# Altium PCB PCB.PcbDoc
Units mil, origin at the board's own origin, x right, y up, seen from the top; angles counter-clockwise.
Board outline 2155 x 1695 mil, 2 copper layers (Top Layer, Bottom Layer); 28 components, 24 nets, 148 pads, 0 vias.
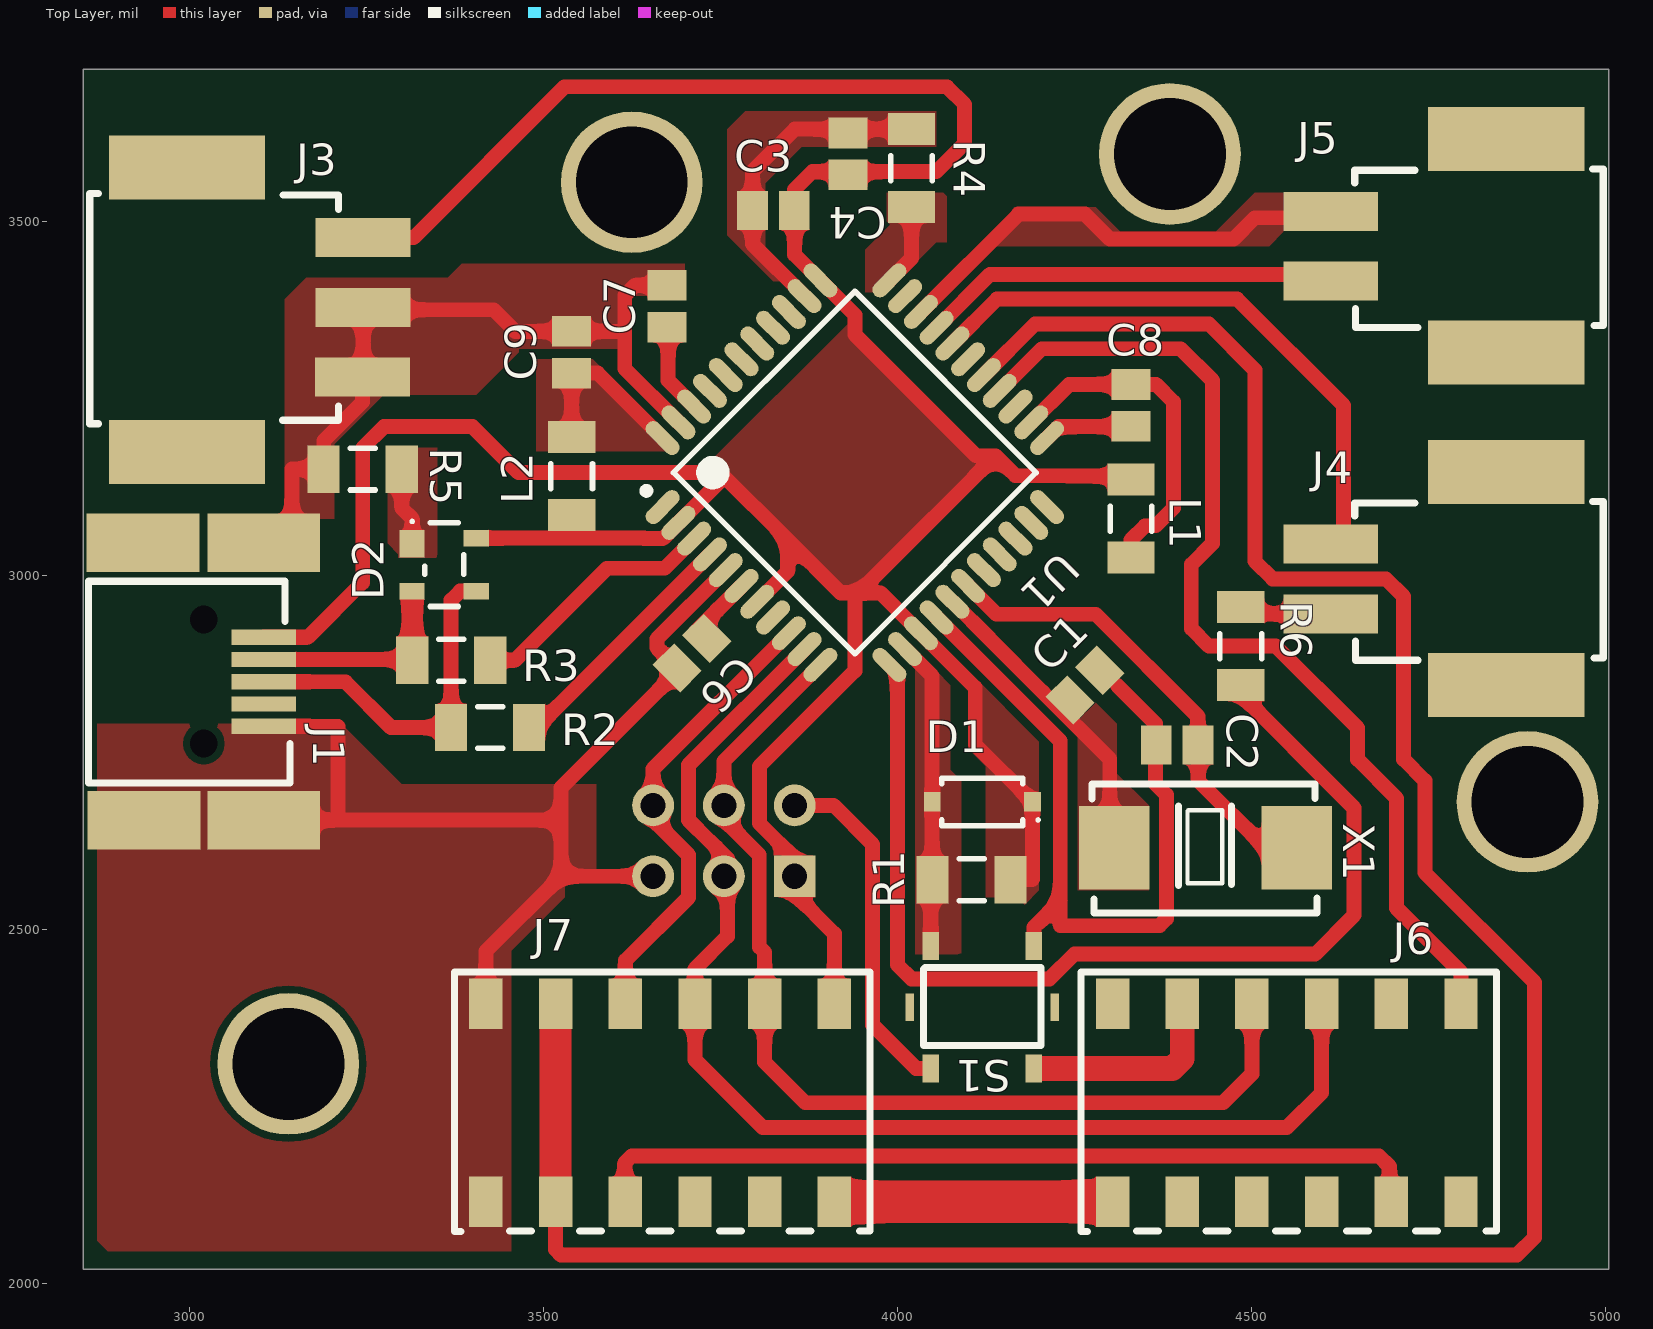
[diagram p0: Top Layer view]
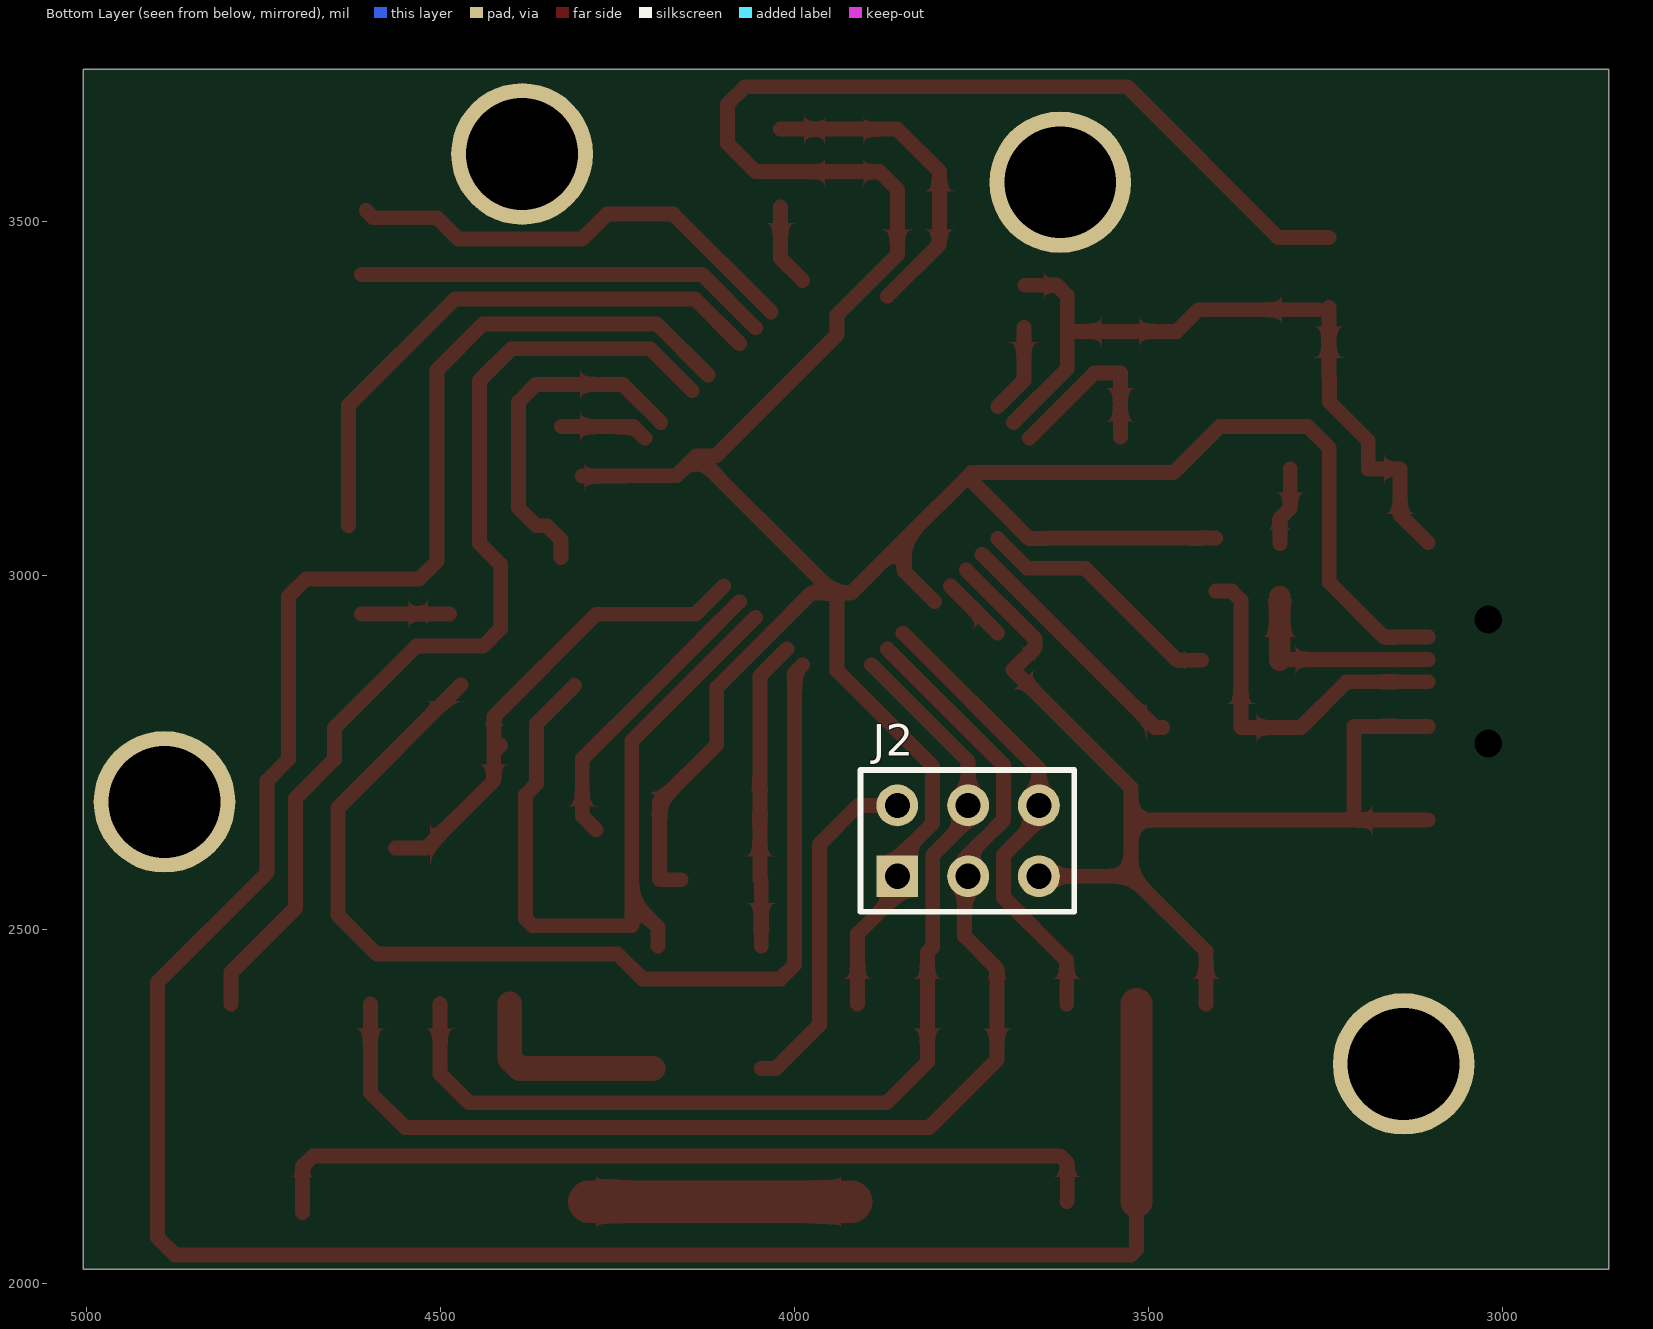
[diagram p1: Bottom Layer view, seen from below]
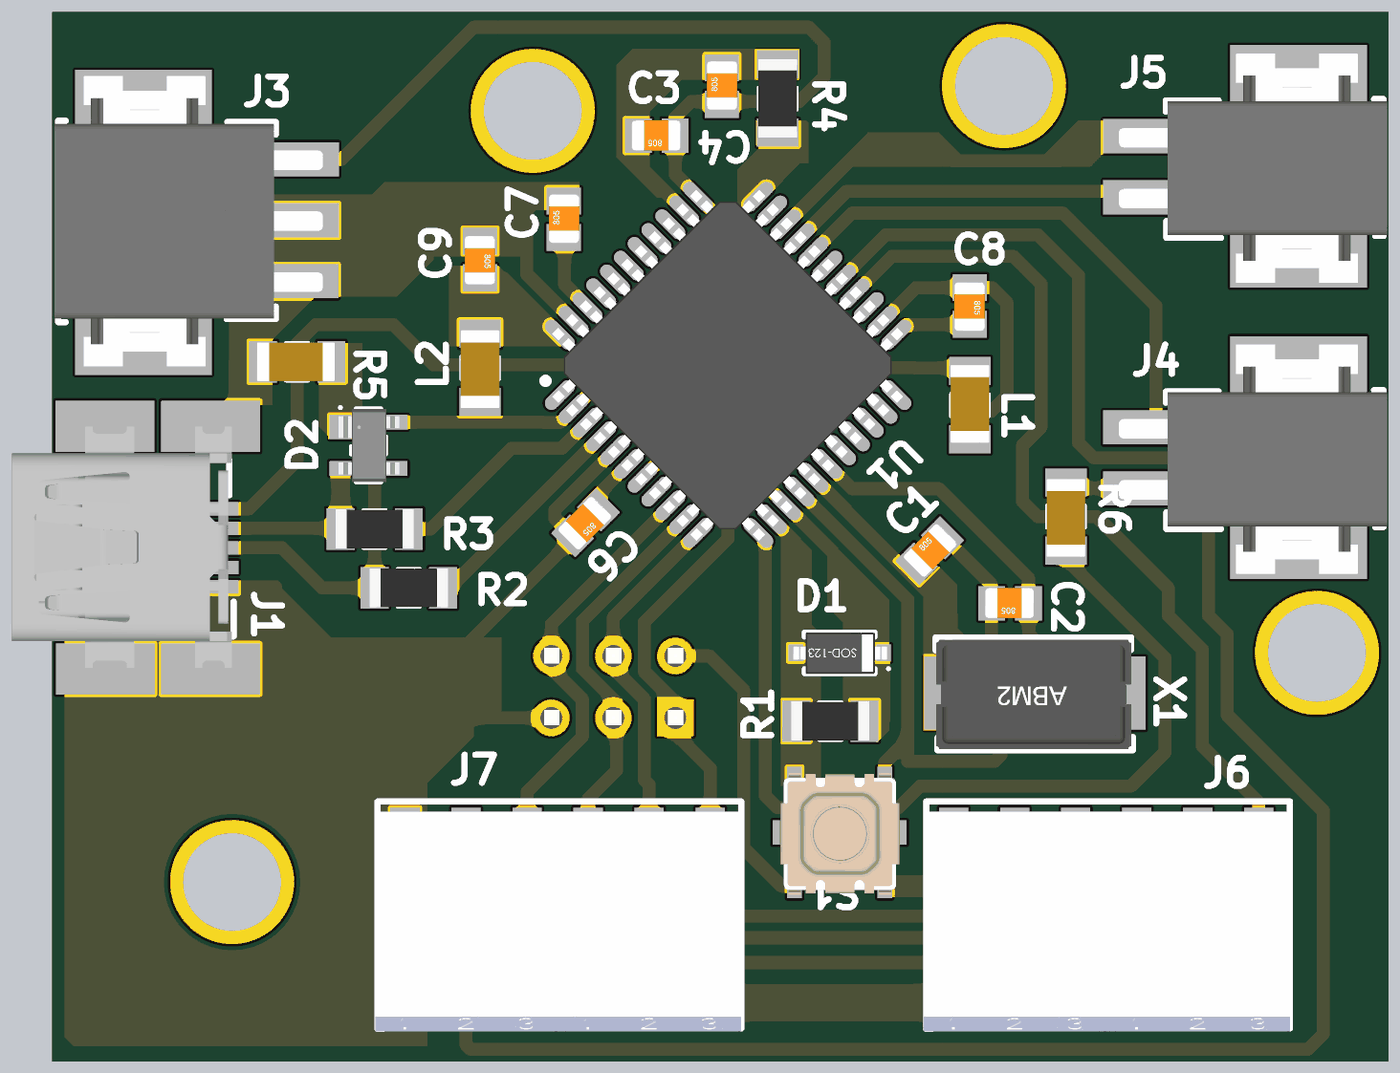
[diagram p2: 3D render of the assembled board from above, using the file's embedded part models]

## Layer stack, top to bottom
Top Solder: solder mask 0.4, Solder Resist, Dk 3.5
Top Layer: signal copper 1.4
Dielectric 1: dielectric 12.6, FR-4, Dk 4.8
Bottom Layer: signal copper 1.4
Bottom Solder: solder mask 0.4, Solder Resist, Dk 3.5

## Board outline
2850,2020 5005,2020 5005,3715 2850,3715

## Design rules (kind name [scope] priority, off if disabled: settings)
Clearance [All] p1: gap=9.8
PolygonConnect [All] p1: connectstyle=Direct reliefconductorwidth=10 reliefentries=4 polygonreliefangle="90 Angle" airgapwidth=10
RoomDefinition SCH [InComponentClass('SCH')] p1: confinementstyle=ConfineOut formatcopy=TRUE lockcomponents=FALSE outline 4675,3755 4985,3755 4985,3950 4675,3950
RoutingVias [All] p1: holewidth=28 width=50 viastyle="Through Hole" minholewidth=28 minwidth=50 maxholewidth=28 maxwidth=50
SolderMaskExpansion [All] p1: expansion=4
Width [All] p1: maxlimit=80 minlimit=10 preferedwidth=30 minimp=50.000000 maximp=50.000000 favimp=50.000000
30 further rules are at their usual default settings.

## Components (designator, comment, footprint, x,y, rotation, side; value= is the part's Value field where it differs from the comment)
C1 "18pF" C0805 4265,2845 r225 top
C2 "18pF" C0805 4395,2760 r0 top
C3 "100nF" C0805 3825,3515 r0 top
C4 "1uF" C0805 3930,3595 r270 top
C6 "100nF" C0805 3710,2890 r45 top
C7 "100nF" C0805 3675,3380 r270 top
C8 "100nF" C0805 4330,3240 r90 top
C9 "100nF" C0805 3540,3315 r90 top
D1 "1N4148" SOD-123 4120,2680 r180 top
D2 "PRTR5V0U2X" SOT143B 3360,3015 r0 top
J1 "USB" "USB Mini-B SMD" 3020,2850 r0 top
J2 "ISP" Header-3x2 3755,2625 r90 bottom
J3 "VCC" TB_SMD_3v 3121.27,3375 r180 top
J4 "M1" TB_SMD_2V 4855,3005 r0 top
J5 "M2" TB_SMD_2V 4855,3475 r0 top
J6 "Encoder-2" "Poke Home H6" 4550,2255 r0 top locked
J7 "Encoder-1" "Poke Home H6" 3665,2255 r0 top locked
L1 "600 Ohm 1.5A" CC_1206 4330,3080 r270 top
L2 "600 Ohm 1.5A" CC_1206 3540,3140 r90 top
R1 "10k" RES_1206 4105,2570 r180 top
R2 "22" RES_1206 3425,2785 r0 top
R3 "22" RES_1206 3370,2880 r0 top
R4 "1k" RES_1206 4020,3575 r90 top
R5 "0" 1206-0Ohm 3245,3150 r0 top
R6 "0" 1206-0Ohm 4485,2900 r90 top
S1 "Boot" EVQPL 4120,2390 r0 top
U1 "ATMEGA32U4" TQFP44 3940,3145 r45 top locked
X1 "16MHz" "ABM2 - XTAL" 4435,2615 r180 top

## Footprints (in the part's own frame and the unit in brackets; to place one, negate y for a bottom-side part, rotate by r counter-clockwise, add the part's x,y. Pads: shape width x height; smd on the part's side, far side on the other; paste and mask are expansions set on the pad)
1206-0Ohm [mm] "Puente 1206"
  rect 1.15x1.7 smd: 1(-1.4,0) 2(1.4,0)
  silkscreen extent -0.45,-0.75 0.45,0.75, body extent -1.65,-0.8 1.55,0.8, height 1
"ABM2 - XTAL" [mm] "Surface Mount 2-SMD, No Lead"
  rect 2.524x3 smd: 1(-3.274,0) 2(3.274,0)
  silkscreen extent -4.01,-2.29 4.07,2.34, body extent -3.95,-2.2 4.05,2.3, height 1.4
C0805 [mm] "Chip Capacitor, Body 2.0x1.3mm, IPC High Density"
  rect 1.1x1.4 smd: 1(-0.75,0) 2(0.75,0)
  body extent -1.03,-0.61 0.97,0.64, height 0.78
CC_1206 [mm] "Capacitor ceramico SMD Y5V 50V"
  rect 1.15x1.7 smd: 1(-1.4,0) 2(1.4,0)
  silkscreen extent -0.45,-0.75 0.45,0.75, body extent -1.65,-0.8 1.55,0.8, height 1
EVQPL [mm] "Panasonic EVQPL Tactile Switch"
  rect 0.3x1 smd: 0(-2.6,0) 0(2.6,0)
  rect 0.6x1 smd: 1(-1.85,-2.2) 1(-1.85,2.2) 2(1.85,-2.2) 2(1.85,2.2)
  silkscreen extent -2.11,-1.37 2.11,1.42, body extent -2.44,-2.55 2.46,2.45, height 1.5
Header-3x2 [mm] "HEADER, 2X3, 2.54MM X 2.54MM PITCH, VERT, TH"
  rect 1.5x1.5 hole 0.9: 1(-1.27,2.54)
  round 1.5 hole 0.9: 2(1.27,2.54) 3(-1.27,0) 4(1.27,0) 5(-1.27,-2.54) 6(1.27,-2.54)
  silkscreen extent -2.54,-3.81 2.54,3.86, body extent -2.54,-3.81 2.54,3.81, height 8.38
"Poke Home H6" [mm] "AVX Poke-Home: Horizontal 18-26 AWG: WTB - 6 ways"
  rect 1.2x1.8 smd: 1(-6.25,-3.55) 1(-6.25,3.55) 2(-3.75,-3.55) 2(-3.75,3.55) 3(-1.25,-3.55) 3(-1.25,3.55) 4(1.25,-3.55) 4(1.25,3.55) 5(3.75,-3.55) 5(3.75,3.55) 6(6.25,-3.55) 6(6.25,3.55)
  silkscreen extent -7.38,-4.62 7.53,4.7, body extent -7.47,-4.72 7.53,4.28, height 5.1
RES_1206 [mm] "Chip Resistor, 2-Leads, Body 3,10x1,55mm, IPC Medium Density"
  rect 1.15x1.7 smd: 1(-1.4,0) 2(1.4,0)
  silkscreen extent -0.45,-0.75 0.45,0.75, body extent -1.6,-0.8 1.6,0.8, height 0.55
SOD-123 [mm] "SODFL, 2-Leads, Body 1.55x3.65mm, IPC Medium Density"
  rect 0.6x0.7 smd: 1(-1.8,0) 2(1.8,0)
  silkscreen extent -2.05,-0.85 1.45,0.85, body extent -1.95,-0.84 1.9,0.86, height 1.43
SOT143B [mm] "SOT143, 4-Leads, Body 2.92x2.30mm, Pitch 1.90mm, IPC Medium Density"
  rect 0.9x1 smd: 1(-1.15,0.75)
  rect 0.9x0.6 smd: 2(-1.15,-0.95) 3(1.15,-0.95) 4(1.15,0.95)
  silkscreen extent -1.2,-1.5 0.7,1.6, body extent -1.22,-1.5 1.27,1.5, height 1.09
TB_SMD_2V [mm] "PC terminal block, 6 A, 160 V, Pitch: 2.5  mm, Spring-cage conn.,  SMD"
  rect 5.6x2.3 smd: 0(0.127,-4.068) 0(0.127,3.581)
  rect 3.4x1.4 smd: 1(-6.172,0.991) 2(-6.172,-1.509)
  silkscreen extent -5.31,-3.17 3.61,2.51, body extent -7.23,-5.02 3.77,4.38, height 5
TB_SMD_3v [mm] "PC terminal block, 6 A, 32 V, Pitch: 2.5  mm, Spring-cage conn.,  SMD"
  rect 5.6x2.3 smd: 0(3.155,5.1) 0(3.155,-5.1)
  rect 3.4x1.4 smd: 1(-3.13,2.413) 2(-3.155,-0.087) 3(-3.155,-2.587)
  silkscreen extent -2.27,-4.17 6.65,4.09, body extent -4.2,-6 6.8,5.9, height 5
TQFP44 [mm] "TQFP, 44-Leads, Body 10.00x10.00mm, Pitch 0.80mm, IPC Medium Density"
  oval 1.5x0.55 smd: 1(-5.75,4) 2(-5.75,3.2) 3(-5.75,2.4) 4(-5.75,1.6) 5(-5.75,0.8) 6(-5.75,0) 7(-5.75,-0.8) 8(-5.75,-1.6) 9(-5.75,-2.4) 10(-5.75,-3.2) 11(-5.75,-4) 23(5.75,-4) 24(5.75,-3.2) 25(5.75,-2.4) 26(5.75,-1.6) 27(5.75,-0.8) 28(5.75,0) 29(5.75,0.8) 30(5.75,1.6) 31(5.75,2.4) 32(5.75,3.2) 33(5.75,4)
  oval 0.55x1.5 smd: 12(-4,-5.75) 13(-3.2,-5.75) 14(-2.4,-5.75) 15(-1.6,-5.75) 16(-0.8,-5.75) 17(0,-5.75) 18(0.8,-5.75) 19(1.6,-5.75) 20(2.4,-5.75) 21(3.2,-5.75) 22(4,-5.75) 34(4,5.75) 35(3.2,5.75) 36(2.4,5.75) 37(1.6,5.75) 38(0.8,5.75) 39(0,5.75) 40(-0.8,5.75) 41(-1.6,5.75) 42(-2.4,5.75) 43(-3.2,5.75) 44(-4,5.75)
  silkscreen extent -5.87,-4.6 4.6,4.95, body extent -6.03,-6.01 5.97,5.99, height 1.1
"USB Mini-B SMD" [mm] "USB Series Mini-B Receptacle"
  round 0.95 hole 1: 0(0.013,-2.225) 0(0.013,2.225)
  rect 2.3x0.55 smd: 1(2.163,1.59) 2(2.163,0.79) 3(2.163,-0.01) 4(2.163,-0.81) 5(2.163,-1.61)
  rect 4.05x2.1 smd: MH(-2.163,4.975) MH(-2.137,-4.975) MH(2.163,-4.975) MH(2.163,4.975)
  silkscreen extent -4.13,-3.64 3.11,3.6, body extent -5.96,-4.93 3.04,4.97, height 3.9

## Part data
C1 C2 C3 C4 C6 C7 C8 C9: library part CAP_CERAMICO, "Ceramic/Tantalum Capacitor"
D1: library part Diodo, "Diodo"
D2: library part ESD-USB, "TVS DIODE 5.5VWM SOT143B"
J1: library part "USB Mini-B", "USB On-The-Go (OTG) Mini-B Receptacle, Right Angle, Thru-Hole, 0.80mm (.031\") Pitch, Solder Tails & Shell Tabs with Dimples"
J2: library part Header_6, "6-pin male header"
J3: library part TB_3, "3-ways Terminal Block"
J4 J5: library part TB_2, "Terminal Block 2 ways"
J6 J7: library part TB_6, "6-ways Terminal Block"
L1 L2: library part Inductor, "Inductor"
R1 R2 R3 R4 R5 R6: library part Resistor, "Resistor"
S1: library part BUTTON, "Switch Button"
U1: "AVR ATmega Microcontroller IC 8-Bit 16MHz 32KB (16K x 16) FLASH"
X1: library part Oscillator, "Crystal Oscillator"

## Free pads (board coordinates)
  round 200 hole 158: 0(3140,2310) 0(3625,3555) 0(4385,3595) 0(4890,2680)

## Nets (pads, with @x,y where several pads share a name; then routed paths per layer and width w, separated by ;. In a path a pad name is that pad's centre, name@x,y a point inside that pad or via, vN(x,y) a via of type N, cw(c..) or ccw(c..) an arc to the next point about the centre after c; other vN are vias at no path point)
+5: C3.2 C4.2 D1.1 D2.4 J1.1 J2.1 J3.3 J6.1 J7.6 L1.1 L2.1 R1.1 U1.2 U1.7 U1.14 U1.34 | length 5494.6
  Top Layer w21: J1.1 3167.59,2912.59 3245,2990 3245,3180 3275,3210 3400,3210 3465,3145 3750,3145 3845,3050 ; J3.3 3316.83,3476.83 3530,3690 4070,3690 4095,3665 4095,3610 4055,3570 3880,3570 3854.53,3544.53 C3.2 ; D2.4 3641.98,3052.4 3642.45,3051.93 3668.24,3051.93 3668.71,3052.4 3669.76,3052.4 3690.32,3072.97 3690.32,3074.01 U1.2 3750,3133.17 ; U1.7 3845,3005.46 3845,3050 ; C3.2@3855,3510.47 3855,3452.71 U1.34 3940,3367.71 3940,3340 4111.14,3168.86 4138.86,3168.86 ; J7.6@3911.06,2394.76 3911.06,2493.94 3855,2550 3855,2595 3859.94,2595 3805.17,2649.77 3805.17,2730.17 3940,2865 3940,2970 3966.37,2996.37 4138.86,3168.86 ; R1.1 4190,2570 4190.87,2570.87 D1.1 4110,2760.87 4110,2841.37 U1.14 3976.37,2975 3920,2975 3845,3050 ; L1.1@4300,3140 4240,3140 4240.63,3140.63 4167.08,3140.63 4138.86,3168.86
  Top Layer w60: J7.6@3920,2115.24 J6.1@4290,2115.24
AREF: C7.2 U1.42 | length 127
  Top Layer w21: C7.2@3676.37,3350 3676.37,3275 U1.42
AVCC1: C8.2 L1.2 U1.24 | length 486.8
  Top Layer w21: U1.24 4242.7,3269.53 C8.2 4365.47,3269.53 4389.88,3245.12 4389.88,3094.88 4365,3070 4350,3070 4330,3050 L1.2
AVCC2: C9.1 L2.2 U1.44 | length 256.9
  Top Layer w21: L2.2 C9.1 3576.82,3285.47 U1.44
CS1: J7.2 U1.27 | length 3665.1
  Top Layer w21: J7.2@3517.36,2115.24 3517.36,2047.64 3525,2040 4875,2040 4900,2065 4900,2425 4745,2580 4745,2710 4715,2740 4715,2970 4690,2995 4530,2995 4505,3020 4505,3290 4440,3355 4194.54,3355 U1.27
  Top Layer w45: J7.2@3517.36,2115.24 J7.2@3517.36,2394.76
CS2: J6.6 U1.26 | length 1449.4
  Top Layer w21: U1.26 4204.08,3320 4400,3320 4445,3275 4445,3045 4415,3015 4415,2925 4440,2900 4534.38,2900 4650,2784.38 4650,2740 4705,2685 4705,2530 4796.06,2438.94 J6.6@4796.06,2394.76
GND: C1.1 C2.1 C3.1 C4.1 C6.1 C7.1 C8.1 C9.2 D2.1 J1.5 J1.MH J2.5 J3.1 J3.2 J6.2 J7.1 R4.2 R5.1 R5.2 S1.2 U1.5 U1.15 U1.23 U1.35 U1.43 | length 4699
  Top Layer w21: J1.MH@3105.15,2654.13 3525,2654.13 ; J1.5 3210,2786.61 3210,2655 3209.13,2654.13 ; J1.MH@3105.15,3045.87 3145,3085.72 3145,3150 R5.1 3189.88,3189.88 3244.5,3244.5 J3.1 ; J3.1@3245.5,3280.98 J3.2 ; J3.2@3260,3375 3430,3375 3460.47,3344.53 C9.2 3614.53,3344.53 ; R5.2 3300.12,3094.88 3314.72,3080.28 D2.1 ; J7.1@3418.94,2394.76 3418.94,2468.94 3525,2575 ; 3615,3291.83 U1.43 ; 3615,3294.35 3615,3395 3629.53,3409.53 C7.1 ; J2.5 3525,2575 ; U1.5 3660.46,2910 3660.46,2897.78 3691.62,2866.62 3525,2700 3525,2575 ; U1.35 3795.47,3467.7 C3.1 3795.47,3570.47 3855.12,3630.12 R4.2 ; U1.15 4230,2765.92 4230,2505 4370,2505 4380,2515 4380,2690 4364.53,2705.47 4364.53,2790.47 4310.88,2844.12 ; S1.2@4192.83,2476.61 4192.83,2502.83 4230,2540 ; U1.23 4227.71,3210 C8.1@4329.53,3210
  Top Layer w35: S1.2@4200,2303.39 4388.39,2303.39 4402.36,2317.36 J6.2@4402.36,2394.76
IN1: J5.1 U1.31 | length 660.3
  Top Layer w21: U1.31 4171.37,3510 4265,3510 4300.3,3474.7 4474.7,3474.7 4505,3505 4595,3505 J5.1@4605,3515
IN2: J5.2 U1.30 | length 587.7
  Top Layer w21: U1.30 4130.92,3425 J5.2@4612,3425
IN3: R6.1 U1.12 | length 1515.7
  Top Layer w21: U1.12 4000,2862.29 4000,2450 4020,2430 4215,2430 4250,2465 4590,2465 4645,2520 4645,2671.35 R6.1@4471.35,2845
IN4: J4.1 U1.29 | length 810.3
  Top Layer w21: U1.29 4140.46,3390 4480,3390 4630,3240 J4.1@4630,3070
MISO: J2.4 J6.3 J7.5 U1.11 | length 1469.3
  Top Layer w21: U1.11 3755,2737.29 3755,2655 3805,2605 3805,2475.28 3812.64,2467.64 3812.64,2394.76 3812.64,2312.36 3870,2255 4460,2255 4500.79,2295.79 J6.3@4500.79,2394.76
MOSI: J2.3 J6.4 J7.4 U1.10 | length 1760.5
  Top Layer w21: U1.10 3705.17,2732 3705.17,2654.36 3734.36,2625.17 3734.83,2625.17 3760,2600 3760,2490 3714.21,2444.21 3714.21,2394.76 3714.21,2315.79 3810,2220 4550,2220 4599.21,2269.21 J6.4@4599.21,2394.76
NetD2_2: D2.2 J1.2 R3.1 | length 298.6
  Top Layer w21: J1.2 R3.1@3313.79,2881.09
  Top Layer w30: R3.1 D2.2@3315,2970
NetD2_3: D2.3 J1.3 R2.1 | length 512
  Top Layer w21: J1.3 3220.4,2849.6 3285,2785 R2.1 3369.88,2964.88 3382.6,2977.6 D2.3
NetJ4_2: J4.2 R6.2 | length 124.6
  Top Layer w21: R6.2@4487.37,2945.57 J4.2
NetR2_2: R2.2 U1.4 | length 356.5
  Top Layer w21: R2.2 3490.92,2785 U1.4
NetR3_2: R3.2 U1.3 | length 359.1
  Top Layer w21: R3.2 3460,2880 3529.31,2949.31 3590,3010 3671.37,3010 U1.3
PROG: R4.1 U1.33 | length 116.4
  Top Layer w21: U1.33 4020,3447.71 R4.1
RESET: D1.2 J2.2 R1.2 S1.1 U1.13 | length 928.5
  Top Layer w21: J2.2 3910,2675 3965,2620 3965,2365 4026.61,2303.39 S1.1@4047.17,2303.39 ; U1.13 4049.13,2857.7 D1.2 R1.2@4049.13,2570.75 ; S1.1@4047.17,2476.61 R1.2@4047.17,2568.78
SCK: J2.6 J6.5 J7.3 U1.9 | length 1879.2
  Top Layer w21: J7.3@3615.79,2115.24 3615,2116.02 3615,2170 3625,2180 4680,2180 4695,2165 J6.5@4695,2100 ; J7.3@3615.79,2394.76 3615.79,2455.79 3705,2545 3705,2605 3645,2665 J2.6 3655,2726.37 U1.9
UCAP: C6.2 U1.6 | length 94.1
  Top Layer w21: C6.2@3713.38,2918.38 U1.6
XTAL1: C2.2 U1.17 X1.1 | length 678.7
  Top Layer w21: U1.17 4140,2945 4280,2945 4424.53,2800.47 C2.2@4424.53,2755 ; C2.2@4415,2760 4425,2750 4425,2710 4520,2615 X1.1
XTAL2: C1.2 U1.16 X1.2 | length 423.2
  Top Layer w21: U1.16 4078.32,2962.66 4130.98,2910 4130.47,2910 4205.47,2835 4300,2740.47 4300,2660.16 X1.2@4280.47,2640.63
pads on no net: J1.0 J1.4 J3.0 J4.0 J5.0 S1.0 U1.1 U1.8 U1.18 U1.19 U1.20 U1.21 U1.22 U1.25 U1.28 U1.32 U1.36 U1.37 U1.38 U1.39 U1.40 U1.41

## Polygon pours and split planes (outlines as drawn)
GND on Top Layer "Top Layer-No Net" (solid, pour order 10): 3280,3180 3350,3180 3350,3030 3355,3025 3295,3025 3295,3030 3280,3045
GND on Top Layer "Top Layer-No Net" (solid, pour order 8): 3614.53,3344.53 3625,3355 3625,3395 3700,3395 3700,3440 3385,3440 3370,3425 3365,3420 3305,3420 3165,3420 3145,3400 3135,3390 3135,3140 3135,3096.06 3132.35,3093.41 3145.75,3080 3205,3080 3205,3185 3250,3230 3275,3255 3330,3255 3405,3255 3410,3260 3465,3315 3465,3320 3615,3320 3620,3325
AVCC2 on Top Layer "Top Layer-No Net" (solid, pour order 6): 3684.68,3175 3560,3175 3490,3175 3490,3305 3570,3305 3590,3285
GND on Top Layer "Top Layer-No Net" (solid, pour order 4): 2870,2790 3215,2790 3285,2720 3300,2705 3575,2705 3575,2580 3580,2575 3530,2575 3530,2545 3460,2475 3455,2470 3455,2045 2885,2045 2870,2060
+5 on Top Layer "Top Layer-No Net" (solid, pour order 2): 3720,3145 3940,3365 3940,3367.71 3940,3340 4111.14,3168.86 4138.86,3168.86 3950,2980 3950,2975 3920,2975 3750,3145 3735,3145
XTAL2 on Top Layer "Top Layer-No Net 1" (solid, pour order 7): 4255,2555 4255,2780 4255,2795 4280,2820 4310,2790 4310,2745 4310,2720 4355,2675 4355,2555
GND on Top Layer "Top Layer-No Net 1" (solid, pour order 9): 4055,3655 3785,3655 3760,3630 3760,3480 3815,3425 3825,3415 3848.17,3415 3848.17,3426.83 3820,3455 3813.56,3461.44 3813.56,3487.48 3813.56,3553.56 3860,3600 3865,3605 4055,3605
PROG on Top Layer "Top Layer-No Net 1" (solid, pour order 11): 3990,3540 4065,3540 4070,3535 4070,3470 4055,3470 4020,3435 3985,3400 3955,3400 3955,3460 3990,3495 3985,3500 3985,3540
IN1 on Top Layer "Top Layer-No Net 1" (solid, pour order 13): 4126.37,3465 4525,3465 4545,3485 4545,3540 4505,3540 4450,3485 4435,3485 4315,3485 4280,3520 4165,3520
+5 on Top Layer "Top Layer-No Net 1" (solid, pour order 15): 4115,2850 4185,2780 4200,2765 4200,2675 4200,2555 4180,2535 4170,2545 4125,2545 4125,2730 4100,2755
RESET on Top Layer "Top Layer-No Net 1" (solid, pour order 17): 4055,2865 4075,2845 4075,2805 4075,2725 4090,2710 4090,2705 4090,2460 4085,2465 4025,2465 4025,2875

## Silkscreen, mask and mechanical layers (free items; w line width, h text height)
Mechanical 1:
  the board outline again, w10